# EAGLE board wagencontroller (EAGLE 6.3)
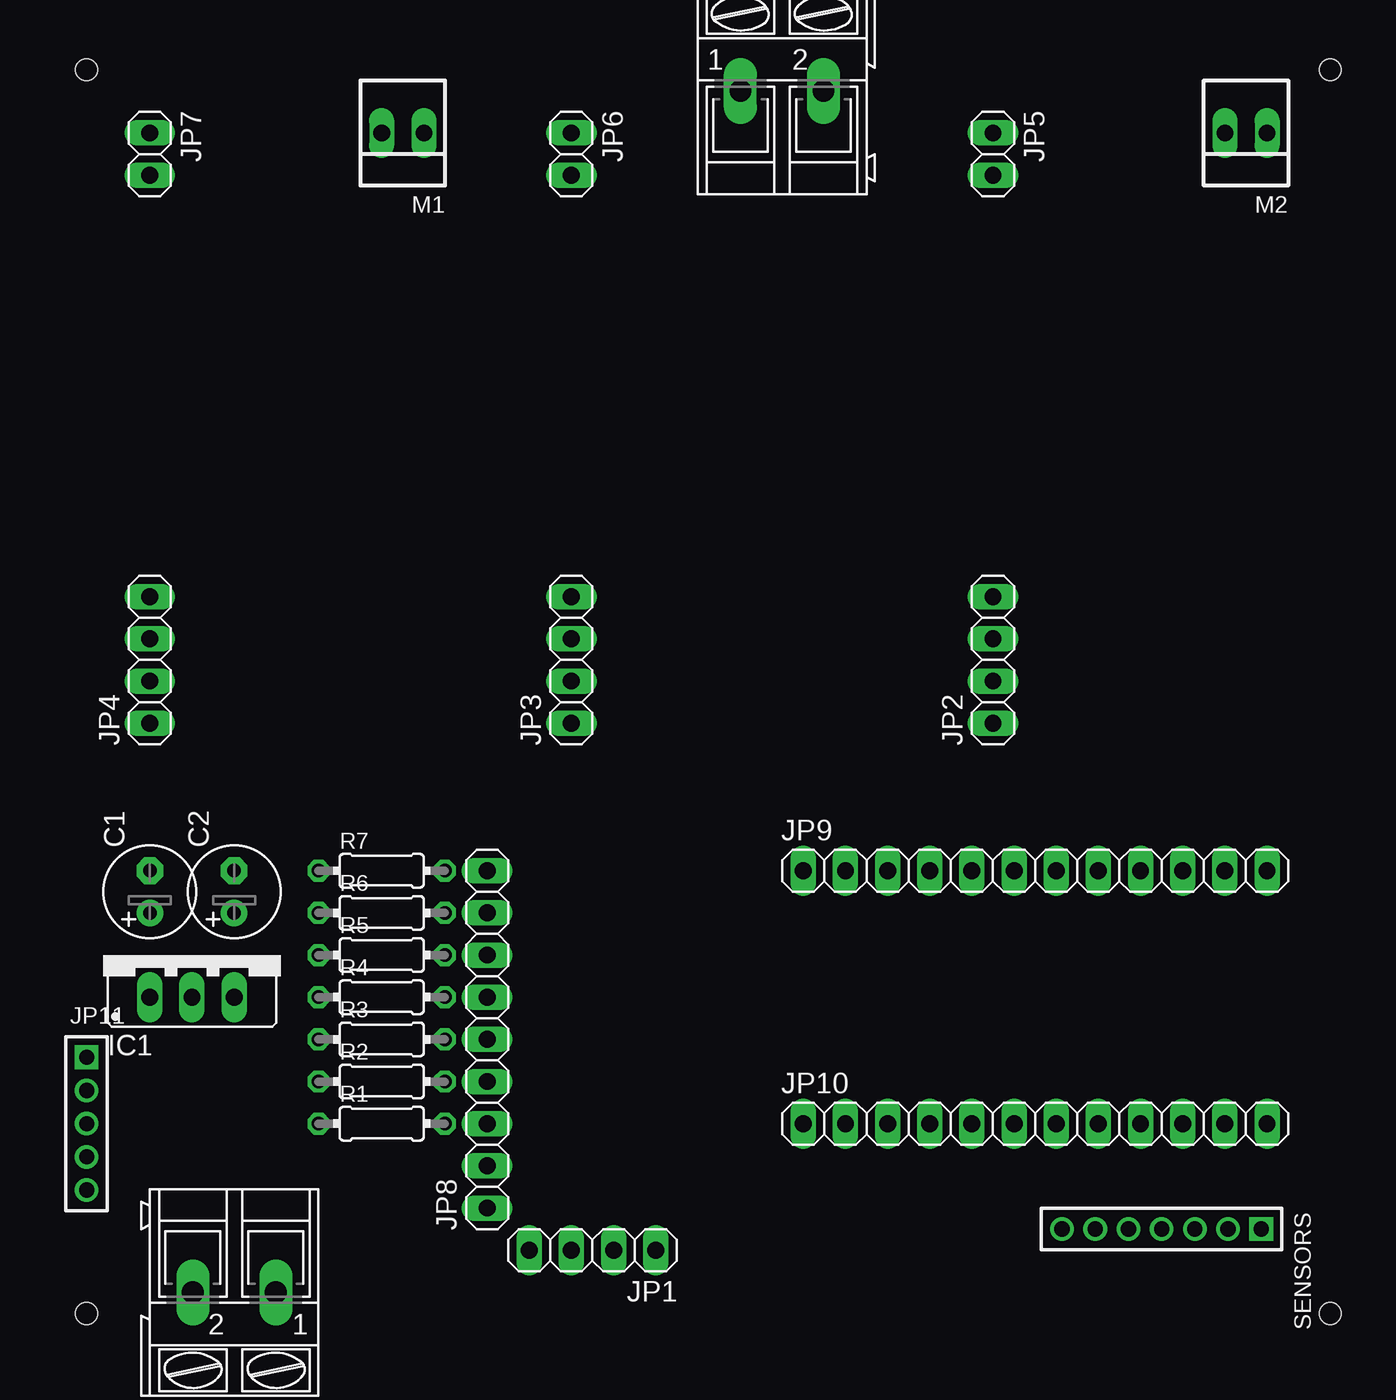
[diagram p0: board, top side]
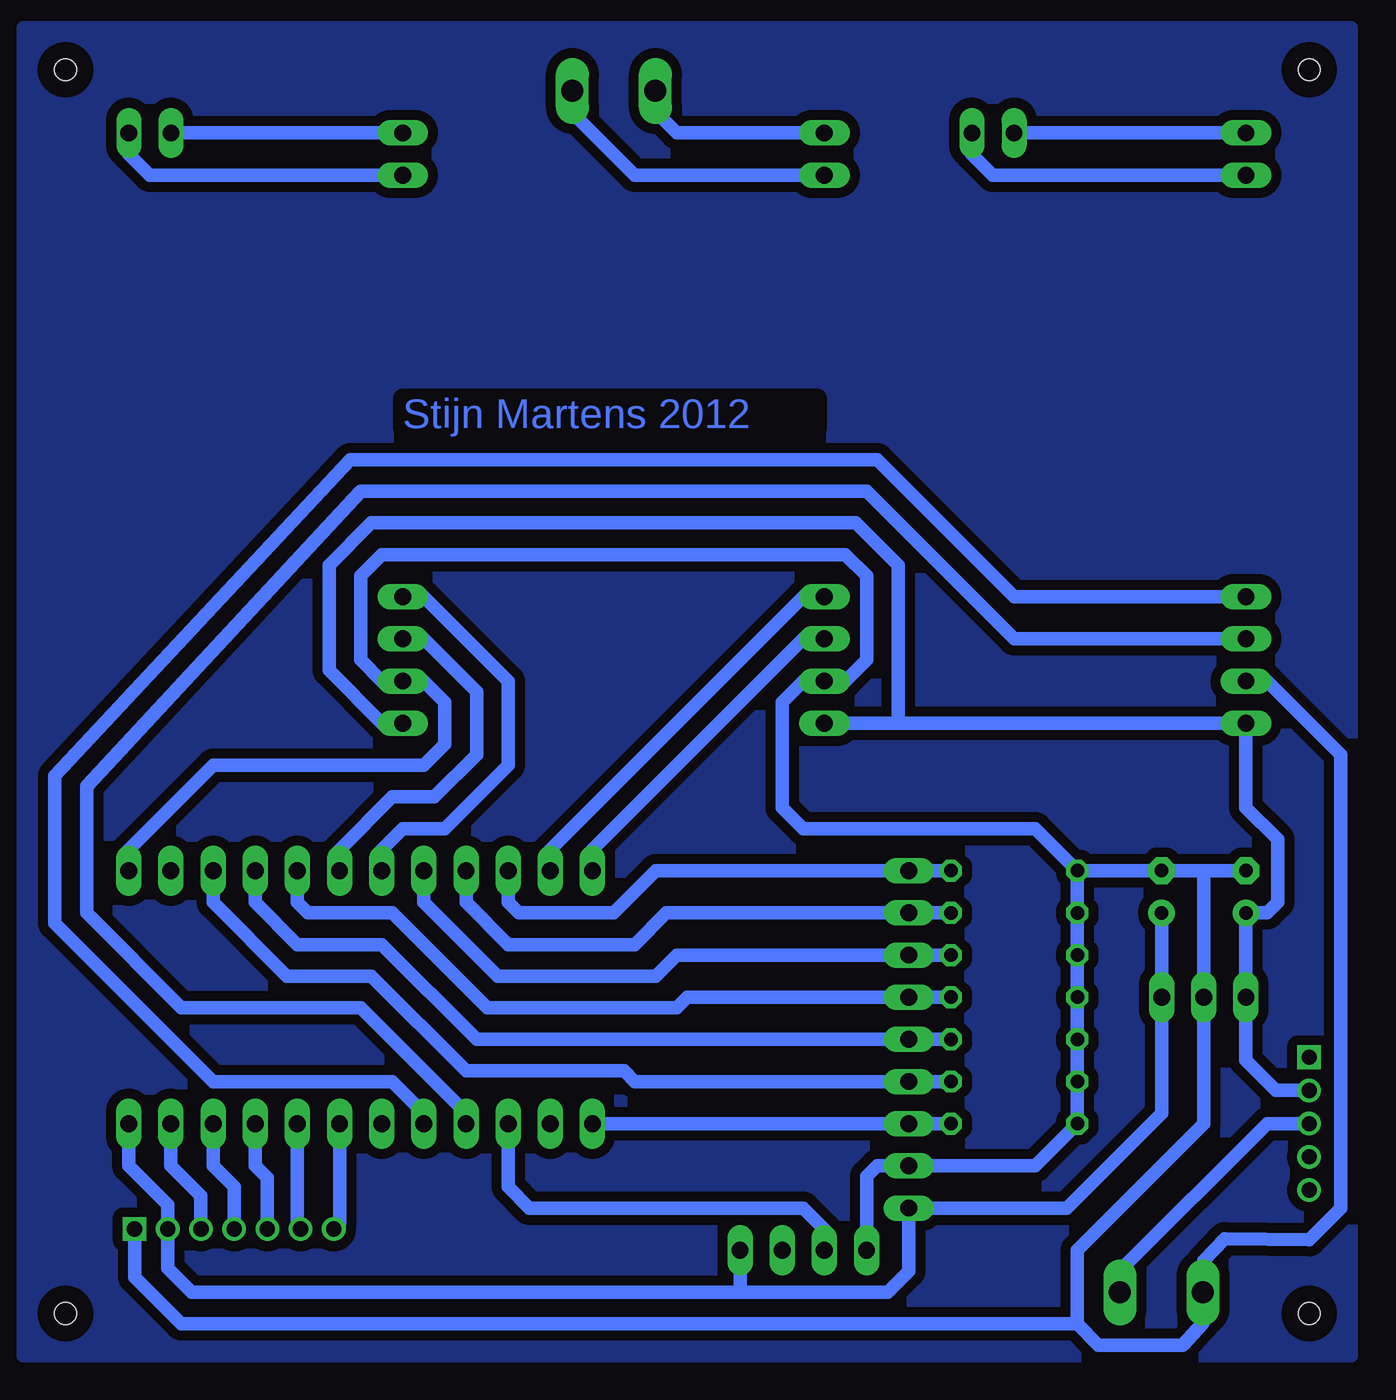
[diagram p1: board, bottom side, seen from below]

No outline drawn. Coordinates in mm, seen from the top.
Copper layers (1*16): Top 0.035mm / dielectric 1.5mm / Bottom 0.035mm
Design rules "default": minimum track width 10mil, minimum drill 24mil, track to track 8mil, track to pad 8mil, pad to pad 8mil, via to via 8mil, smd to smd 8mil, copper to edge 40mil, drill to drill 8mil, minimum pad ring 10mil, minimum via ring 8mil, stop-mask expansion 4mil, vias tented up to drill 0mil, thermal gap 10mil
Holes 1.3 mm at 77.47,2.54 2.54,2.54 2.54,77.47 77.47,77.47

## Footprints (pad centres in the part's own frame; a part is rotated, then mirrored left to right if it is on the bottom)
E2,5-6 = drill 0.813 pad 1.6: + -1.27,0 | drill 0.813 pad 1.6 octagon: - 1.27,0
78XXS = drill 1.016 long: GND 0,-2.54; IN -2.54,-2.54; OUT 2.54,-2.54
1X04 = drill 1.016 long: 1 -3.81,0; 2 -1.27,0; 3 1.27,0; 4 3.81,0
1X02 = drill 1.016 long: 1 -1.27,0; 2 1.27,0
1X09 = drill 1.016 long: 1 -10.16,0; 2 -7.62,0; 3 -5.08,0; 4 -2.54,0; 5 0,0; 6 2.54,0; 7 5.08,0; 8 7.62,0; 9 10.16,0
1X12 = drill 1.016 long: 1 -13.97,0; 2 -11.43,0; 3 -8.89,0; 4 -6.35,0; 5 -3.81,0; 6 -1.27,0; 7 1.27,0; 8 3.81,0; 9 6.35,0; 10 8.89,0; 11 11.43,0; 12 13.97,0
1X05M = drill 0.914 square: 1 -4,0 | drill 0.914: 2 -2,0; 3 0,0; 4 2,0; 5 4,0
22-23-2021 = drill 1 long: 1 -1.27,0; 2 1.27,0
AK300/2 = drill 1.321 long: 1 -2.515,0; 2 2.489,0
0204/7 = drill 0.813 octagon: 1 -3.81,0; 2 3.81,0
1X07M = drill 0.914 square: 1 -6,0 | drill 0.914: 2 -4,0; 3 -2,0; 4 0,0; 5 2,0; 6 4,0; 7 6,0

## Placement (x,y rotation side)
C1  [E2,5-6]  6.35,27.94 90 top
C2  [E2,5-6]  11.43,27.94 90 top
IC1  5V Regulator  [78XXS]  8.89,24.13 0 top
JP1  RF Receiver  [1X04]  33.02,6.35 180 top
JP2  Motor driver 1  [1X04]  57.15,41.91 90 top
JP3  Motor driver 3  [1X04]  31.75,41.91 90 top
JP4  Motor driver 2  [1X04]  6.35,41.91 90 top
JP5  [1X02]  57.15,72.39 270 top
JP6  [1X02]  31.75,72.39 270 top
JP7  [1X02]  6.35,72.39 270 top
JP8  Schakelaars dienblad  [1X09]  26.67,19.05 90 top
JP9  [1X12]  59.69,29.21 0 top
JP10  [1X12]  59.69,13.97 0 top
JP11  [1X05M]  2.54,13.97 270 top
M1  22-23-2021  [22-23-2021]  21.59,73.66 180 top
M2  22-23-2021  [22-23-2021]  72.39,73.66 180 top
M3  [AK300/2]  44.45,76.2 0 top
M4  [AK300/2]  11.43,3.81 180 top
R1  10k  [0204/7]  20.32,13.97 0 top
R2  10k  [0204/7]  20.32,16.51 0 top
R3  10k  [0204/7]  20.32,19.05 0 top
R4  10k  [0204/7]  20.32,21.59 0 top
R5  10k  [0204/7]  20.32,24.13 0 top
R6  10k  [0204/7]  20.32,26.67 0 top
R7  10k  [0204/7]  20.32,29.21 0 top
SENSORS  Sensors  [1X07M]  67.31,7.62 180 top

## Library data of the parts
C1 C2 R1-R7 = rcl
IC1 = v-reg
JP1-JP10 = pinhead
JP11 SENSORS = pinhead-2
M1 M2 = con-molex; MF: MOLEX; MPN: 22-23-2021; OC_FARNELL: 1462926; OC_NEWARK: 25C3832
M3 M4 = con-ptr500; OC_FARNELL: unknown; OC_NEWARK: unknown

## Nets
+5V: C2.+ IC1.OUT JP1.1 JP8.1 JP10.12 SENSORS.2
GND: C1.- C2.- IC1.GND JP1.4 JP2.2 JP3.2 JP4.2 JP8.2 JP9.12 M4.2 R1.1 R2.1 R3.1 R4.1 R5.1 R6.1 R7.1 SENSORS.1
N$1: JP2.4 JP9.6
N$2: JP8.9 JP9.3 R7.2
N$3: JP1.3 JP10.3
N$4: JP2.3 JP9.7
N$5: JP3.4 JP9.2
N$6: JP3.3 JP9.1
N$7: JP4.3 JP10.4
N$8: JP4.4 JP10.5
N$9: JP6.1 M3.1
N$10: JP6.2 M3.2
N$11: JP5.1 M2.2
N$12: JP5.2 M2.1
N$13: JP7.1 M1.2
N$14: JP7.2 M1.1
N$15: JP10.7 SENSORS.7
N$16: JP10.8 SENSORS.6
N$17: JP10.9 SENSORS.5
N$18: JP10.10 SENSORS.4
N$19: JP10.11 SENSORS.3
N$20: JP8.8 JP9.4 R6.2
N$21: JP8.7 JP9.5 R5.2
N$22: JP8.6 JP9.8 R4.2
N$23: JP8.4 JP9.10 R2.2
N$24: JP11.3 M4.1
N$25: JP8.3 JP10.1 R1.2
N$28: JP8.5 JP9.9 R3.2
VCC: C1.+ IC1.IN JP2.1 JP3.1 JP4.1 JP11.2

## Tracks (layer width: path | path; a pad name or v marks a point on that pad's centre or on a via)
+5V
  Bottom 0.813: 36.83,3.81 27.94,3.81 26.67,5.08 JP8.1 17.14,8.89 11.43,14.61 IC1.OUT C2.+ | 36.83,3.81 JP1.1 | 36.83,3.81 69.85,3.81 71.31,5.27 SENSORS.2 71.31,9.08 73.66,11.43 JP10.12
GND
  Bottom 0.813: R2.1 R3.1 R4.1 | R2.1 R1.1 19.05,11.43 JP8.2 28.57,11.43 29.21,10.79 JP1.4 | R2.1 R4.1 | R4.1 R5.1 R6.1 R7.1 | JP4.2 5.08,40.64 0.64,36.2 0.64,8.89 2.54,6.99 7.62,7.04 8.89,5.71 8.94,5.03 M4.2 8.94,1.96 10.16,0.64 15.24,0.64 16.51,1.91 | 16.51,1.91 70.48,1.91 73.31,4.73 SENSORS.1 | R7.1 19.05,31.75 33.02,31.75 34.29,33.02 34.29,39.37 33.02,40.64 JP3.2 30.48,40.64 29.21,41.91 29.21,46.99 30.48,48.26 58.42,48.26 59.69,46.99 59.69,41.91 58.42,40.64 JP2.2 55.88,40.64 54.61,39.37 54.61,36.83 55.88,35.56 68.58,35.56 73.66,30.48 JP9.12 | C1.- 8.89,29.21 | 8.89,29.21 C2.- R7.1 | 8.89,29.21 IC1.GND 8.89,13.97 16.51,6.35 16.51,1.91
N$1
  Bottom 0.813: JP2.4 55.88,45.72 50.8,40.64 50.8,35.56 54.61,31.75 57.15,31.75 58.42,30.48 JP9.6
N$2
  Bottom 0.813: R7.2 JP8.9 41.91,29.21 44.45,26.67 50.16,26.67 50.8,27.3 JP9.3
N$3
  Bottom 0.813: JP1.3 31.75,7.62 33.02,8.89 49.53,8.89 50.8,10.16 JP10.3
N$4
  Bottom 0.813: JP2.3 55.88,43.18 52.7,40.01 52.7,36.2 55.24,33.66 57.78,33.66 60.96,30.48 JP9.7
N$5
  Bottom 0.813: JP3.4 33.02,45.72 48.26,30.48 JP9.2
N$6
  Bottom 0.813: JP3.3 33.02,43.18 34.29,41.91 45.72,30.48 JP9.1
N$7
  Bottom 0.813: JP4.3 20.32,43.18 29.21,52.07 59.69,52.07 76.2,34.29 76.2,26.67 70.48,20.95 59.69,20.95 53.34,14.61 JP10.4
N$8
  Bottom 0.813: JP4.4 20.32,45.72 28.57,53.98 60.33,53.98 78.11,34.92 78.11,26.04 68.58,16.51 57.78,16.51 55.88,14.61 JP10.5
N$9
  Bottom 0.813: M3.1 41.94,74.95 40.64,73.66 JP6.1
N$10
  Bottom 0.813: JP6.2 43.18,71.12 46.99,74.93 46.99,76.15 M3.2
N$11
  Bottom 0.813: JP5.1 M2.2
N$12
  Bottom 0.813: JP5.2 72.39,71.12 73.66,72.39 M2.1
N$13
  Bottom 0.813: M1.2 JP7.1
N$14
  Bottom 0.813: JP7.2 21.59,71.12 22.86,72.39 M1.1
N$15
  Bottom 0.813: JP10.7 60.96,7.97 SENSORS.7
N$16
  Bottom 0.813: JP10.8 63.5,7.81 SENSORS.6
N$17
  Bottom 0.813: SENSORS.5 65.31,10.7 66.04,11.43 JP10.9
N$18
  Bottom 0.813: SENSORS.4 67.31,10.16 68.58,11.43 JP10.10
N$19
  Bottom 0.813: SENSORS.3 69.31,9.62 71.12,11.43 JP10.11
N$20
  Bottom 0.813: R6.2 JP8.8 41.27,26.67 43.18,24.77 50.8,24.77 53.34,27.3 JP9.4
N$21
  Bottom 0.813: R5.2 JP8.7 40.64,24.13 41.91,22.86 51.44,22.86 55.88,27.3 JP9.5
N$22
  Bottom 0.813: R4.2 JP8.6 40.01,21.59 40.64,20.95 52.07,20.95 57.78,26.67 62.87,26.67 63.5,27.3 JP9.8
N$23
  Bottom 0.813: R2.2 JP8.4 43.18,16.51 43.81,17.14 53.34,17.14 59.05,22.86 64.14,22.86 68.58,27.3 JP9.10
N$24
  Bottom 0.813: M4.1 13.95,5.11 5.08,13.97 JP11.3
N$25
  Bottom 0.813: R1.2 JP8.3 JP10.1
N$26
  pour Bottom (isolate 0.61): 0,0 0,80.01 80.01,80.01 80.01,0
N$28
  Bottom 0.813: R3.2 JP8.5 52.7,19.05 58.42,24.77 63.5,24.77 66.04,27.3 JP9.9
VCC
  Bottom 0.813: 27.3,38.1 JP4.1 6.35,33.02 4.45,31.11 4.45,27.3 5.08,26.67 C1.+ IC1.IN 6.35,17.78 4.54,15.97 JP11.2 | 27.3,38.1 27.3,47.62 29.84,50.16 59.05,50.16 61.59,47.62 61.59,41.27 58.42,38.1 JP2.1 | 27.3,38.1 JP3.1

## Text on the board
Bottom: Stijn Martens 2012